# Altium PCB Z80PC.PcbDoc
Units mm, origin at the board's own origin, x right, y up, seen from the top; angles counter-clockwise.
Board outline 90 x 65 mm, 2 copper layers (Top Layer, Bottom Layer); 16 components, 45 nets, 184 pads, 66 vias.
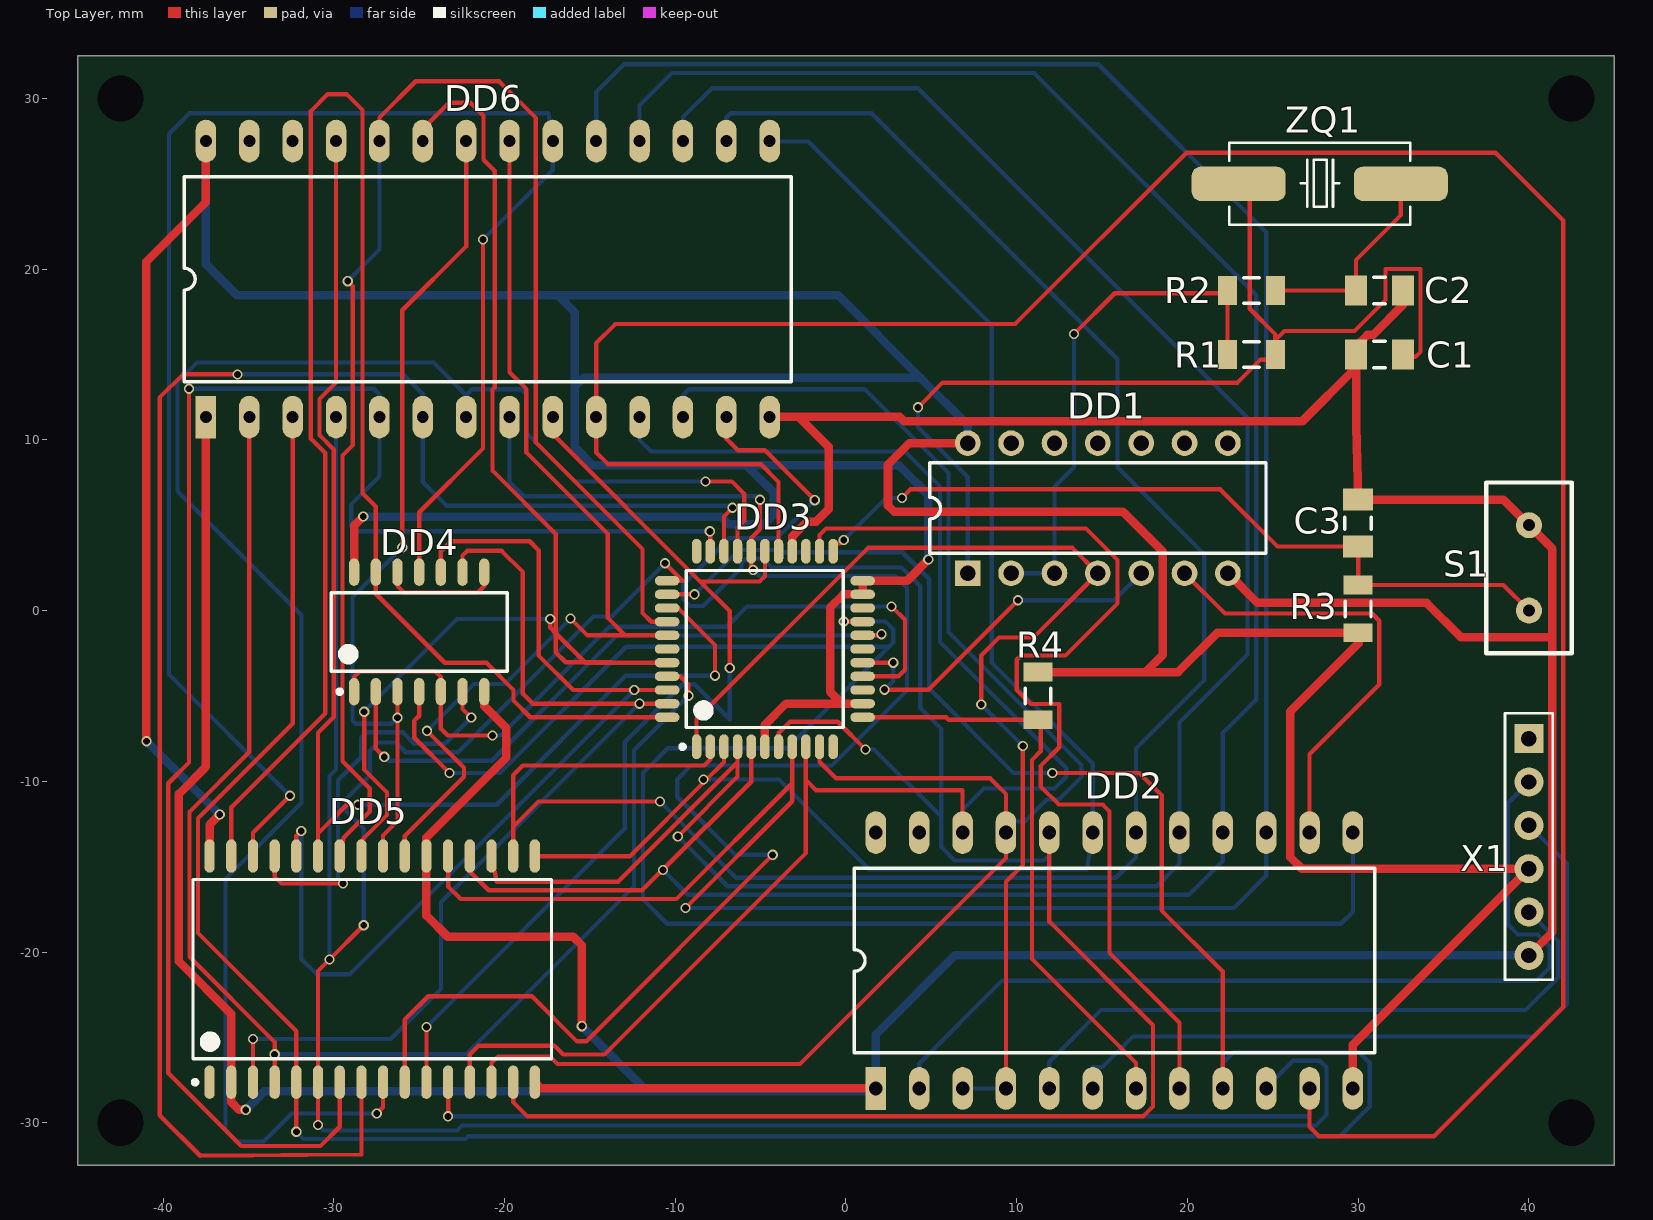
[diagram p0: Top Layer view]
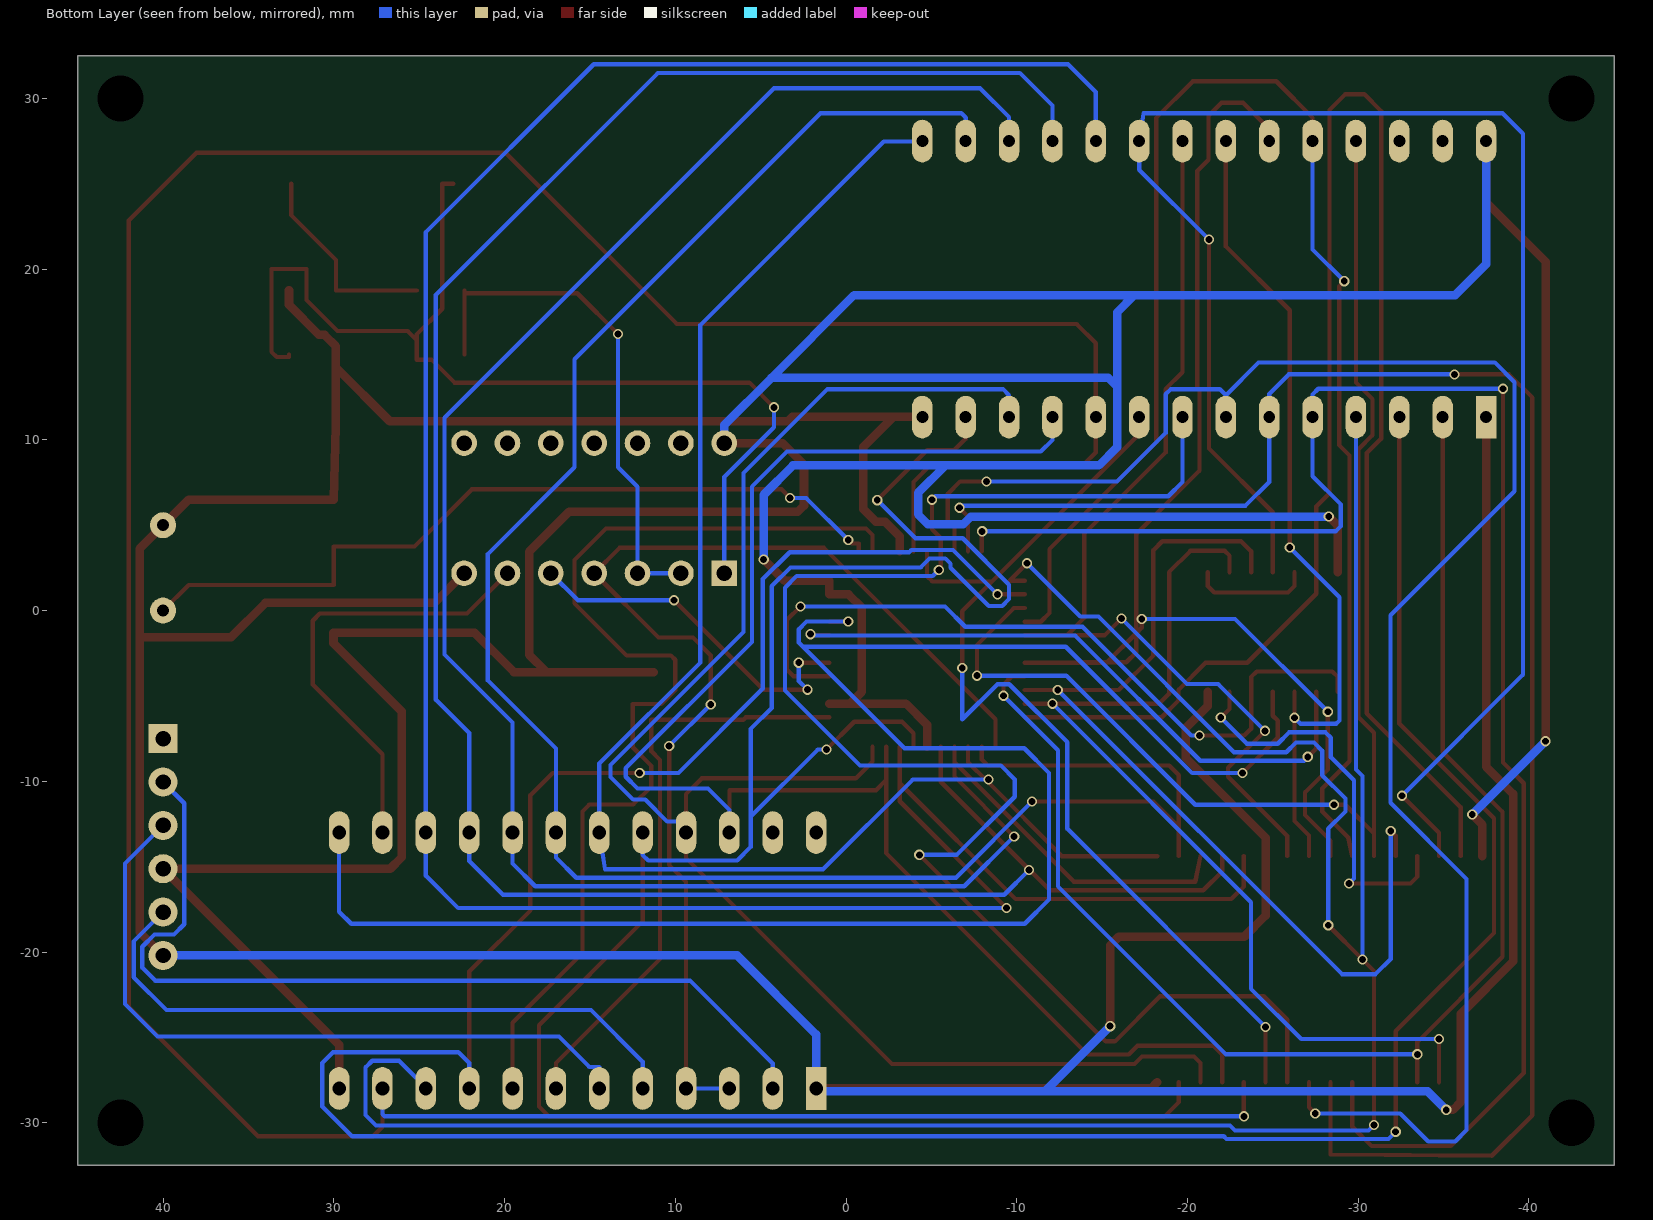
[diagram p1: Bottom Layer view, seen from below]
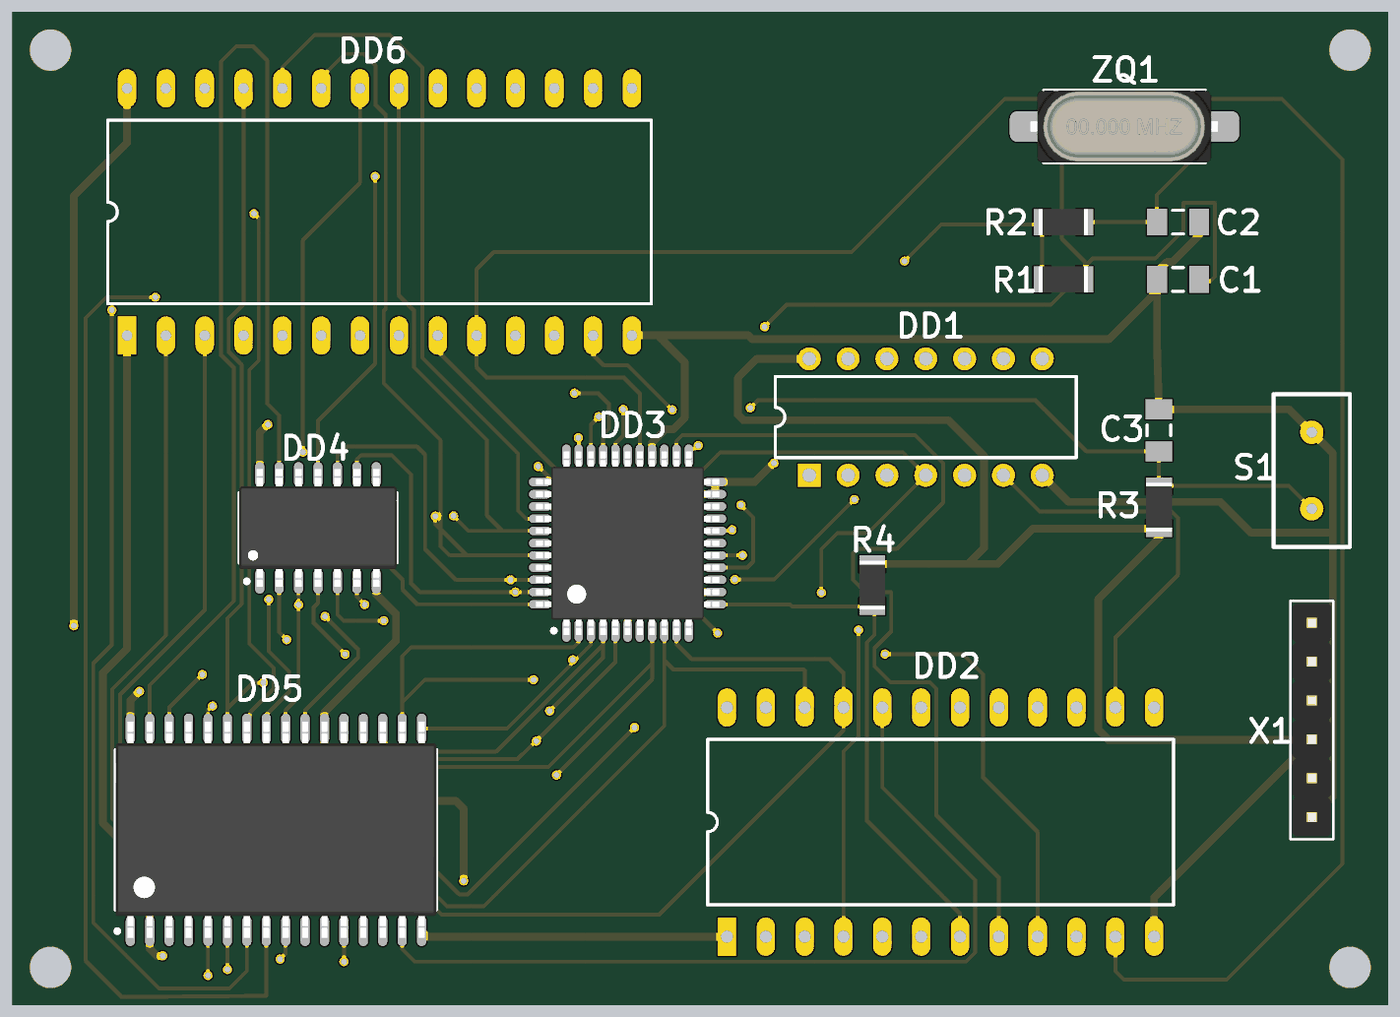
[diagram p2: 3D render of the assembled board from above, using the file's embedded part models]

## Layer stack, top to bottom
Top Solder: solder mask 0.0102, Solder Resist, Dk 3.5
Top Layer: signal copper 0.0356
Dielectric 1: dielectric 0.32, FR-4, Dk 4.8
Bottom Layer: signal copper 0.0356
Bottom Solder: solder mask 0.0102, Solder Resist, Dk 3.5

## Board outline
-45,-32.5 -45,32.5 45,32.5 45,-32.5

## Design rules (kind name [scope] priority, off if disabled: settings)
Clearance [All] p1: gap=0.25 ignorepadtopadclearanceinfootprint=TRUE
ComponentClearance [All] p1: gap=1 collisioncheckmode=3 verticalgap=1 showdistances=FALSE
DiffPairsRouting [InDifferentialPair('No Differential Pair')] p1: maxlimit=0.254 minlimit=0.254 mostfreqgap=0.254 toplayer_minwidth=0.381 toplayer_maxwidth=0.381 toplayer_prefwidth=0.381 bottomlayer_minwidth=0.381 bottomlayer_maxwidth=0.381 bottomlayer_prefwidth=0.381 maxuncoupledlength=12.7
HoleSize [All] p1: absolutevalues=TRUE maxlimit=2.5 minlimit=0.4 maxpercent=80.000 minpercent=20.000
PolygonConnect [All] p1: connectstyle=Relief reliefconductorwidth=0.254 reliefentries=4 polygonreliefangle="90 Angle" airgapwidth=0.254
RoutingVias [All] p1: holewidth=0.4 width=0.6 viastyle="Through Hole" minholewidth=0.4 minwidth=0.6 maxholewidth=0.4 maxwidth=0.6
SolderMaskExpansion [All] p1: expansion=0.1 istentingtop=FALSE
UnRoutedNet [All] p1: checkbadconnections=TRUE
Width GND [InNet('GND')] p1: maxlimit=0.5 minlimit=0.25 preferedwidth=0.5
Width +5 [InNet('+5')] p2: maxlimit=0.5 minlimit=0.25 preferedwidth=0.5
Width [All] p3: maxlimit=0.25 minlimit=0.25 preferedwidth=0.25
26 further rules are at their usual default settings.

## Classes and differential pairs
net class D[0..7]: D0 D1 D2 D3 D4 D5 D6 D7
net class A[0..15]: A0 A1 A2 A3 A4 A5 A6 A7 A8 A9 A10 A11 A12 A13 A14 A15

## Components (designator, comment, footprint, x,y, rotation, side; value= is the part's Value field where it differs from the comment)
C1 "22p" "1206 Capacitor" 31.25,15 r0 top
C2 "22p" "1206 Capacitor" 31.25,18.75 r180 top
C3 "22p" "1206 Capacitor" 30,5.125 r270 top
DD1 "74HCT04" N014 14.75,6 r0 top
DD2 "MC6850S" DIP24 1.75,-27.99 r90 top
DD3 "Z84C0008AEG" LQFP44 -4.75,-2.25 r90 top (schematic designator DD5)
DD4 "74LCX32" SOP14 -25,-1.25 r90 top (schematic designator DD3)
DD5 "HM628128D" SOP32 -27.75,-21 r90 top (schematic designator DD6)
DD6 "M2764A" DIP28 -37.49,11.33 r90 top (schematic designator DD7)
R1 "1M" "1206 Resistor" 23.75,15 r0 top
R2 "1K" "1206 Resistor" 23.75,18.75 r180 top
R3 "2.2K" "1206 Resistor" 30,0.1 r270 top
R4 "3.3K" "1206 Resistor" 11.25,-5 r90 top
S1 "Reset" btn 40,5 r0 top
X1 "USB" PLS-6 40,-13.845 r0 top
ZQ1 "7,3728-HC49SM" HC-49S 27.75,25 r0 top

## Footprints (in the part's own frame and the unit in brackets; to place one, negate y for a bottom-side part, rotate by r counter-clockwise, add the part's x,y. Pads: shape width x height; smd on the part's side, far side on the other; paste and mask are expansions set on the pad)
"1206 Capacitor" [mm] "Chip Capacitor, 2-Leads, Body 3,20x1,60mm, IPC Medium Density"
  rect 1.3x1.75 smd: 1(-1.375,0) 2(1.375,0)
  silkscreen extent -0.35,-0.78 0.35,0.77, body extent -1.6,-0.8 1.6,0.8, height 1.6
"1206 Resistor" [mm] "Chip Resistor, 2-Leads, Body 3,10x1,60mm, IPC Medium Density"
  rect 1.1x1.7 smd: 1(-1.4,0) 2(1.4,0)
  silkscreen extent -0.45,-0.75 0.45,0.75, body extent -1.6,-0.85 1.6,0.85, height 0.65
btn [mil]
  round 60 hole 27.56: 1(0,0) 2(0,-196.85)
  silkscreen extent -98,-295 98,98
DIP24 [mm]
  rect 2.5x1.2 hole 0.8: 1(0,0)
  oval 2.5x1.2 hole 0.8: 2(0,-2.54) 3(0,-5.08) 4(0,-7.62) 5(0,-10.16) 6(0,-12.7) 7(0,-15.24) 8(0,-17.78) 9(0,-20.32) 10(0,-22.86) 11(0,-25.4) 12(0,-27.94) 13(14.99,-27.94) 14(14.99,-25.4) 15(14.99,-22.86) 16(14.99,-20.32) 17(14.99,-17.78) 18(14.99,-15.24) 19(14.99,-12.7) 20(14.99,-10.16) 21(14.99,-7.62) 22(14.99,-5.08) 23(14.99,-2.54) 24(14.99,0)
  silkscreen extent 2.08,-29.21 12.9,1.27, body extent 1,-30 14,2, height 1.55
DIP28 [mm]
  rect 2.5x1.2 hole 0.7: 1(0,0)
  oval 2.5x1.2 hole 0.7: 2(0,-2.54) 3(0,-5.08) 4(0,-7.62) 5(0,-10.16) 6(0,-12.7) 7(0,-15.24) 8(0,-17.78) 9(0,-20.32) 10(0,-22.86) 11(0,-25.4) 12(0,-27.94) 13(0,-30.48) 14(0,-33.02) 15(16.17,-33.02) 16(16.17,-30.48) 17(16.17,-27.94) 18(16.17,-25.4) 19(16.17,-22.86) 20(16.17,-20.32) 21(16.17,-17.78) 22(16.17,-15.24) 23(16.17,-12.7) 24(16.17,-10.16) 25(16.17,-7.62) 26(16.17,-5.08) 27(16.17,-2.54) 28(16.17,0)
  silkscreen extent 2.09,-34.29 14.08,1.27, body extent 1,-35 15,2, height 5.8
HC-49S [mm]
  rrect50% 5.5x2 smd: 1(-4.75,0) 2(4.75,0)
  silkscreen extent -5.3,-2.4 5.3,2.4, body extent -6.17,-2.35 6.13,2.35, height 4.35
LQFP44 [mm] "LQFP, 44-Leads, Body 10,00x10,00mm, Pitch 0,80mm, IPC Medium Densit"
  oval 1.45x0.55 smd: 1(-5.725,4) 2(-5.725,3.2) 3(-5.725,2.4) 4(-5.725,1.6) 5(-5.725,0.8) 6(-5.725,0) 7(-5.725,-0.8) 8(-5.725,-1.6) 9(-5.725,-2.4) 10(-5.725,-3.2) 11(-5.725,-4) 23(5.725,-4) 24(5.725,-3.2) 25(5.725,-2.4) 26(5.725,-1.6) 27(5.725,-0.8) 28(5.725,0) 29(5.725,0.8) 30(5.725,1.6) 31(5.725,2.4) 32(5.725,3.2) 33(5.725,4)
  oval 0.55x1.45 smd: 12(-4,-5.725) 13(-3.2,-5.725) 14(-2.4,-5.725) 15(-1.6,-5.725) 16(-0.8,-5.725) 17(0,-5.725) 18(0.8,-5.725) 19(1.6,-5.725) 20(2.4,-5.725) 21(3.2,-5.725) 22(4,-5.725) 34(4,5.725) 35(3.2,5.725) 36(2.4,5.725) 37(1.6,5.725) 38(0.8,5.725) 39(0,5.725) 40(-0.8,5.725) 41(-1.6,5.725) 42(-2.4,5.725) 43(-3.2,5.725) 44(-4,5.725)
  silkscreen extent -5.85,-4.6 4.6,4.95, body extent -6,-6 6,6, height 1.6
N014 [mm] "DIP; 14 Leads; Row Spacing 7.62 mm; Pitch 2.54 mm"
  rect 1.5x1.5 hole 0.9: 1(-7.62,-3.81)
  round 1.5 hole 0.9: 2(-5.08,-3.81) 3(-2.54,-3.81) 4(0,-3.81) 5(2.54,-3.81) 6(5.08,-3.81) 7(7.62,-3.81) 8(7.62,3.81) 9(5.08,3.81) 10(2.54,3.81) 11(0,3.81) 12(-2.54,3.81) 13(-5.08,3.81) 14(-7.62,3.81)
  silkscreen extent -9.85,-2.65 9.85,2.65
PLS-6 [mm]
  rect 1.7x1.7 hole 0.9: 1(0,6.345)
  round 1.7 hole 0.9: 2(0,3.805) 3(0,1.265) 5(0,-3.815) 6(0,-6.355)
  round 1.7 hole 0.9 mask+0.102: 4(0,-1.275)
  silkscreen extent -1.4,-7.77 1.4,7.83, body extent -1.27,-7.58 1.27,7.66, height 8.54
SOP14 [mm] "SOP, 14-Leads, Body 10,20x5,30mm, Pitch 1,27mm, IPC Medium Density"
  oval 1.6x0.6 smd: 1(-3.5,3.81) 2(-3.5,2.54) 3(-3.5,1.27) 4(-3.5,0) 5(-3.5,-1.27) 6(-3.5,-2.54) 7(-3.5,-3.81) 8(3.5,-3.81) 9(3.5,-2.54) 10(3.5,-1.27) 11(3.5,0) 12(3.5,1.27) 13(3.5,2.54) 14(3.5,3.81)
  silkscreen extent -3.62,-5.15 2.3,5.15, body extent -3.85,-5.15 3.85,5.15, height 2.1
SOP32 [mm] "SOP, 32-Leads, Body 20,70x11,30mm, Pitch 1,27mm, IPC Medium Density"
  oval 1.95x0.6 smd: 1(-6.625,9.525) 2(-6.625,8.255) 3(-6.625,6.985) 4(-6.625,5.715) 5(-6.625,4.445) 6(-6.625,3.175) 7(-6.625,1.905) 8(-6.625,0.635) 9(-6.625,-0.635) 10(-6.625,-1.905) 11(-6.625,-3.175) 12(-6.625,-4.445) 13(-6.625,-5.715) 14(-6.625,-6.985) 15(-6.625,-8.255) 16(-6.625,-9.525) 17(6.625,-9.525) 18(6.625,-8.255) 19(6.625,-6.985) 20(6.625,-5.715) 21(6.625,-4.445) 22(6.625,-3.175) 23(6.625,-1.905) 24(6.625,-0.635) 25(6.625,0.635) 26(6.625,1.905) 27(6.625,3.175) 28(6.625,4.445) 29(6.625,5.715) 30(6.625,6.985) 31(6.625,8.255) 32(6.625,9.525)
  silkscreen extent -6.75,-10.5 5.25,10.5, body extent -7.07,-10.5 7.07,10.5, height 3

## Part data
C1 C2 C3: library part Capacitor
DD1: "6x not gate"
DD2: "ACIA"
DD3: "Z80 CPU, 8Mhz"
DD4: "4x 2-or gates"
DD5: "RAM"
DD6: "eprom"
R1 R2 R3 R4: library part Resistor, "5%, 0.5W"
S1: library part btn
ZQ1: "Резонатор"

## Free pads (board coordinates)
  round 1.524 hole 2.7: 17(-42.5,30) 18(-42.5,-30) 19(42.5,-30) 20(42.5,30)

## Via types
v1: diameter 0.6, hole 0.4, Top Layer to Bottom Layer, 66 vias

## Nets (pads, with @x,y where several pads share a name; then routed paths per layer and width w, separated by ;. In a path a pad name is that pad's centre, name@x,y a point inside that pad or via, vN(x,y) a via of type N, cw(c..) or ccw(c..) an arc to the next point about the centre after c; other vN are vias at no path point)
+5: DD1.14 DD2.12 DD3.6 DD3.13 DD3.21 DD3.22 DD4.14 DD5.32 DD6.28 R3.2 R4.2 X1.4 | length 308.1
  Top Layer w0.5: v1(-40.974,-7.653) -40.974,20.439 -37.49,23.923 DD6.28 ; DD5.32 -37.275,-12.54 v1(-36.681,-11.946) ; DD4.14 -28.81,4.972 v1(-28.274,5.509) ; DD3.6 -4.75,-6.688 -3.512,-5.45 -0.232,-5.45 ; DD3.13 -0.232,-5.45 ; v1(4.823,2.989) 3.583,1.75 DD3.22 DD3.21 -0.155,0.95 -0.93,0.175 -0.93,-4.752 -0.232,-5.45 ; DD1.14 3.718,9.81 2.46,8.552 2.46,6.152 2.816,5.796 16.214,5.796 18.564,3.447 18.564,-2.584 17.548,-3.6 ; R4.2 17.548,-3.6 ; DD2.12 29.69,-25.43 X1.4 26.692,-15.12 26.032,-14.46 26.032,-5.901 30.019,-1.913 30.019,-1.3 R3.2 21.753,-1.3 19.453,-3.6 17.548,-3.6
  Bottom Layer w0.5: v1(-40.974,-7.653) v1(-36.681,-11.946) ; DD6.28 -37.49,20.283 -35.684,18.477 -16.888,18.477 ; v1(-28.274,5.509) -7.319,5.509 -6.857,5.047 -4.804,5.047 -4.22,5.631 -4.22,6.901 -5.82,8.501 ; v1(4.823,2.989) 4.823,6.787 3.108,8.501 -5.82,8.501 ; DD1.14 7.13,10.874 4.372,13.632 ; -16.888,18.477 -0.473,18.477 4.372,13.632 ; -16.888,18.477 -15.878,17.467 -15.878,13.124 ; -15.878,13.124 -15.878,9.568 -14.812,8.501 -5.82,8.501 ; -15.878,13.124 -15.37,13.632 4.372,13.632
A0: DD2.11 DD3.27 DD5.12 DD6.10 | length 205.3
  Top Layer w0.25: v1(-23.305,-29.624) DD5.12 ; DD3.27 -3.95,7.536 -4.991,8.577 -13.948,8.577 -14.63,9.259 DD6.10 -14.63,15.664 -13.509,16.785 9.906,16.785 19.936,26.815 38.046,26.815 42.008,22.852 42.008,-23.223 34.439,-30.793 27.708,-30.793 27.15,-30.235 DD2.11
  Bottom Layer w0.25: v1(-23.305,-29.624) 27.023,-29.624 27.15,-29.497 DD2.11
A1: DD3.28 DD5.11 DD6.9 | length 60.5
  Top Layer w0.25: DD5.11 v1(-24.575,-24.392) ; DD6.9 -17.17,10.326 -8.543,1.699 ; v1(-6.811,-3.361) -6.811,-0.033 -8.543,1.699 ; DD3.28 -4.75,2.007 -5.058,1.699 -8.543,1.699
  Bottom Layer w0.25: v1(-24.575,-24.392) -12.965,-12.782 -12.965,-7.711 -9.565,-4.311 -8.868,-4.311 -6.811,-6.369 v1(-6.811,-3.361)
A2: DD3.29 DD5.10 DD6.8 | length 93.8
  Top Layer w0.25: DD5.10 -25.845,-23.96 -24.473,-22.588 -18.388,-22.588 -15.747,-25.23 -15.218,-25.23 v1(-4.296,-14.308) ; v1(-5.439,2.38) -5.55,2.491 DD3.29 -5.55,4.255 -5.042,4.763 v1(-5.042,6.495)
  Bottom Layer w0.25: DD6.8 -19.71,7.536 -18.87,6.696 -5.244,6.696 v1(-5.042,6.495) ; v1(-5.439,2.38) -5.083,2.024 2.892,2.024 3.578,1.338 3.578,-4.681 -0.816,-9.076 -9.071,-9.076 -9.884,-9.888 -9.884,-10.904 -6.48,-14.308 v1(-4.296,-14.308)
A3: DD3.30 DD5.9 DD6.7 | length 103.8
  Top Layer w0.25: v1(-27.481,-29.457) -27.115,-29.091 DD5.9 ; v1(-8.233,7.561) -6.685,7.561 -5.967,6.843 -5.967,5.246 -6.35,4.864 DD3.30
  Bottom Layer w0.25: v1(-27.481,-29.457) -32.467,-29.457 -34.108,-31.097 -35.681,-31.097 -36.351,-30.427 -36.351,-15.72 -31.891,-11.26 -31.891,-0.276 -39.159,6.992 -39.159,13.378 -38.004,14.533 -24.167,14.533 -22.25,12.616 ; DD6.7 -22.25,12.616 ; v1(-8.233,7.561) -15.878,7.561 -18.723,10.406 -18.723,12.667 -19.028,12.972 -21.894,12.972 -22.25,12.616
A4: DD3.31 DD5.8 DD6.6 | length 102.2
  Top Layer w0.25: v1(-35.64,13.835) -38.84,13.835 -40.201,12.474 -40.201,-29.558 -37.824,-31.936 -28.385,-31.859 DD5.8 ; DD3.31 -7.15,5.513 v1(-6.642,6.021)
  Bottom Layer w0.25: v1(-35.64,13.835) -25.937,13.835 -24.79,12.688 DD6.6 -24.79,7.536 -23.401,6.147 -6.768,6.147 v1(-6.642,6.021)
A5: DD3.32 DD5.7 DD6.5 | length 97.5
  Top Layer w0.25: v1(-38.484,12.997) -38.484,-8.893 -39.701,-10.11 -39.701,-27.087 -35.422,-31.366 -30.787,-31.366 -29.655,-30.234 DD5.7 ; v1(-7.975,4.64) -7.95,4.615 DD3.32
  Bottom Layer w0.25: v1(-38.484,12.997) -27.664,12.997 -27.33,12.663 DD6.5 -27.33,7.87 -28.985,6.215 -28.985,4.945 -28.68,4.64 v1(-7.975,4.64)
A6: DD2.10 DD3.34 DD5.6 DD6.4 | length 147.7
  Top Layer w0.25: v1(-30.925,-30.132) DD5.6 -30.925,-21.105 v1(-30.253,-20.434) v1(-28.248,-18.429) ; v1(-10.598,2.769) -9.579,1.75 DD3.34
  Bottom Layer w0.25: v1(-30.925,-30.132) -30.608,-30.45 -22.785,-30.45 -22.493,-30.158 27.53,-30.158 28.14,-29.548 28.14,-26.754 27.751,-26.365 26.184,-26.365 25.211,-27.338 24.61,-27.338 DD2.10 ; v1(-30.253,-20.434) -30.253,-9.694 -29.87,-9.311 DD6.4 ; v1(-28.248,-18.429) -28.248,-12.773 -29.253,-11.768 -29.253,-11.006 -27.888,-9.64 -27.888,-8.206 -27.41,-7.728 -26.359,-7.728 -25.791,-8.296 -22.731,-8.296 -14.785,-0.351 -13.718,-0.351 v1(-10.598,2.769)
A7: DD2.9 DD3.35 DD5.5 DD6.3 | length 182
  Top Layer w0.25: DD6.3 -32.41,-6.619 -37.951,-12.16 -37.951,-18.884 -32.195,-24.64 DD5.5 v1(-32.195,-30.526) ; DD3.35 v1(-8.868,0.95) ; v1(12.087,-9.507) 17.177,-9.507 18.488,-10.819 18.488,-17.559 22.07,-21.141 DD2.9
  Bottom Layer w0.25: v1(-32.195,-30.526) -31.771,-30.95 -22.287,-30.95 -22.13,-30.793 28.927,-30.793 30.68,-29.04 30.68,-26.5 30.045,-25.865 22.705,-25.865 22.07,-26.5 DD2.9 ; v1(-8.868,0.95) -6.263,3.555 -3.828,3.555 -3.694,3.421 3.299,3.421 4.873,1.846 4.873,-4.572 9.809,-9.507 v1(12.087,-9.507)
A8: DD3.36 DD5.27 DD6.25 | length 75.6
  Top Layer w0.25: DD5.27 -30.925,-13.048 ; DD6.25 -29.87,13.359 -30.845,12.384 -30.845,10.276 -30,9.431 -30,-6.226 -30.925,-7.151 -30.925,-13.048 ; v1(-28.578,-11.37) -29.247,-11.37 -30.925,-13.048 ; DD3.36 -9.833,0.15 -7.674,-2.009 v1(-7.674,-3.811)
  Bottom Layer w0.25: v1(-28.578,-11.37) -20.454,-11.37 -12.896,-3.811 v1(-7.674,-3.811)
A9: DD3.37 DD5.26 DD6.24 | length 89.9
  Top Layer w0.25: DD5.26 -29.417,-13.292 -27.893,-11.768 -27.893,-10.422 -29.493,-8.822 -29.493,9.085 -28.883,9.695 -28.883,18.991 v1(-29.188,19.296) ; DD6.24 -27.33,28.872 -25.202,31 -20.318,31 -18.164,28.847 -18.164,9.847 -11.916,3.599 -11.916,-0.142 -11.408,-0.65 DD3.37
  Bottom Layer w0.25: v1(-29.188,19.296) -27.33,21.154 DD6.24
A10: DD3.38 DD5.23 DD6.21 | length 58.6
  Top Layer w0.25: DD5.23 -25.845,-13.2 -22.381,-9.736 -22.381,-9.203 v1(-24.54,-7.044) ; DD6.21 -19.71,13.958 -18.723,12.972 -18.723,9.263 -13.948,4.488 -13.948,-0.434 -12.932,-1.45 ; v1(-16.132,-0.465) -15.147,-1.45 -12.932,-1.45 ; DD3.38 -12.932,-1.45
  Bottom Layer w0.25: v1(-24.54,-7.044) -21.797,-4.3 -19.968,-4.3 v1(-16.132,-0.465)
A11: DD3.40 DD5.25 DD6.23 | length 73
  Top Layer w0.25: DD5.25 -28.385,-13.476 -26.885,-11.975 -26.885,-10.646 -28.223,-9.308 v1(-28.223,-5.926) ; DD6.23 -24.79,28.21 -23.25,29.75 -22,29.75 -21.238,28.988 -21.238,26.408 -20.577,25.748 -20.577,13.073 -20.704,12.946 -20.704,8.196 -16.996,4.488 -16.996,-1.329 ; v1(-17.326,-0.49) -17.326,-0.998 -16.996,-1.329 ; DD3.40 -13.745,-3.05 ; -16.996,-1.329 -16.996,-2.446 -16.412,-3.03 -15.294,-3.03 ; -16.996,-1.329 -15.294,-3.03 ; -15.294,-3.03 -15.275,-3.05 -13.745,-3.05 ; -15.294,-3.03 -13.764,-3.03 -13.745,-3.05
  Bottom Layer w0.25: v1(-28.223,-5.926) -22.787,-0.49 v1(-17.326,-0.49)
A12: DD3.41 DD5.4 DD6.2 | length 82.2
  Top Layer w0.25: DD6.2 -34.95,-8.286 -38.451,-11.787 -38.451,-20.279 -33.465,-25.265 v1(-33.465,-25.992) DD5.4 ; DD3.41 -9.706,-3.85 -9.224,-4.333 v1(-9.224,-4.986)
  Bottom Layer w0.25: v1(-33.465,-25.992) -22.254,-25.992 -12.414,-16.152 -12.414,-8.177 v1(-9.224,-4.986)
A13: DD3.42 DD4.10 DD5.28 | length 57.8
  Top Layer w0.25: DD5.28 -32.195,-13.194 v1(-31.906,-12.905) ; DD4.10 -23.73,3.472 -23.138,4.064 -18.528,4.064 -18.001,3.537 -18.001,-2.629 -15.98,-4.65 v1(-12.406,-4.65) DD3.42
  Bottom Layer w0.25: v1(-31.906,-12.905) -31.906,-20.404 -31.017,-21.293 -29.049,-21.293 v1(-12.406,-4.65)
A14: DD3.43 DD4.9 DD5.3 | length 57.2
  Top Layer w0.25: DD5.3 v1(-34.735,-25.095) ; DD4.9 -22.46,3.218 -22.181,3.497 -20.171,3.497 -18.926,2.253 -18.926,-4.871 -18.347,-5.45 v1(-12.094,-5.45) DD3.43
  Bottom Layer w0.25: v1(-34.735,-25.095) -26.666,-25.095 -23.727,-22.157 -23.727,-17.083 v1(-12.094,-5.45)
A15: DD3.44 DD4.13 DD5.31 | length 99.2
  Top Layer w0.25: DD5.31 -36.005,-11.524 -30.5,-6.019 -30.5,9.224 -31.345,10.069 -31.345,29.259 -30.354,30.25 -29.25,30.25 -28.324,29.324 -28.324,6.876 -27.54,6.091 DD4.13 -27.54,0.983 -23.501,-3.056 -21.06,-3.056 -19.472,-4.644 -19.472,-5.273 -18.495,-6.25 DD3.44
D0: DD2.22 DD3.9 DD5.13 DD6.11 | length 93
  Top Layer w0.25: DD5.13 -22.035,-25.992 -21.527,-25.484 -17.074,-25.484 -16.563,-25.994 -14.152,-25.994 -2.35,-14.192 -2.35,-9.929 ; DD3.9 -2.35,-9.929 ; DD2.22 6.83,-10.549 6.805,-10.523 -1.756,-10.523 -2.35,-9.929
  Bottom Layer w0.25: DD6.11 -12.09,9.996 -11.408,9.314 3.451,9.314 5.505,7.261 5.505,-1.834 12.898,-9.228 12.898,-9.736 12.208,-10.427 8.082,-10.427 6.83,-11.679 DD2.22
D1: DD2.21 DD3.10 DD5.14 DD6.12 | length 99.1
  Top Layer w0.25: DD5.14 -20.765,-26.5 -20.384,-26.119 -17.333,-26.119 -16.899,-26.552 -2.697,-26.552 9.37,-14.486 DD2.21 9.37,-10.752 8.445,-9.827 -0.573,-9.827 -1.55,-8.85 DD3.10
  Bottom Layer w0.25: DD6.12 -9.55,12.616 -9.194,12.972 1.089,12.972 6.005,8.056 6.005,-1.254 13.789,-9.038 13.789,-9.749 12.468,-11.07 11.757,-11.07 10.475,-12.352 9.37,-12.352 DD2.21
D2: DD2.20 DD3.7 DD5.15 DD6.13 | length 129.2
  Top Layer w0.25: DD5.15 -19.495,-28.786 -18.657,-29.624 17.396,-29.624 17.98,-29.04 17.98,-24.289 11.91,-18.22 DD2.20 ; DD6.13 -7.01,10.072 -6.328,9.39 -4.753,9.39 v1(-1.832,6.469) ; DD3.7 -3.95,-7.18 -3.28,-6.51 -0.486,-6.51 v1(1.14,-8.136)
  Bottom Layer w0.25: v1(-1.832,6.469) -4.067,4.234 -6.836,4.234 -9.554,1.516 -9.554,0.678 -9.151,0.275 -8.357,0.275 -6.125,2.507 -6.125,2.75 -5.82,3.055 -4.895,3.055 -4.371,2.531 3.249,2.531 4.347,1.433 4.347,-5.704 5.585,-6.942 5.585,-12.073 ; v1(1.14,-8.136) 1.648,-8.136 5.585,-12.073 ; DD2.20 11.91,-14.308 11.58,-14.638 6.372,-14.638 5.585,-13.851 5.585,-12.073
D3: DD2.19 DD3.3 DD5.17 DD6.15 | length 90.9
  Top Layer w0.25: DD5.17 -18.225,-14.384 -12.653,-14.384 v1@-8.251,-9.983 ; v1(-8.345,-9.888) v1@-8.251,-9.983 ; DD3.3 -7.15,-8.882 v1@-8.251,-9.983
  Bottom Layer w0.25: v1(-8.345,-9.888) -3.915,-9.888 1.343,-15.146 14.12,-15.146 DD2.19 14.45,-8.955 8.531,-3.036 8.531,16.731 -2.213,27.475 -4.47,27.475 DD6.15
D4: DD2.18 DD3.2 DD5.18 DD6.16 | length 120.1
  Top Layer w0.25: DD5.18 -19.495,-12.667 ; v1(-10.9,-11.184) -18.012,-11.184 -19.495,-12.667 ; DD3.2 -7.95,-8.72 -8.306,-9.076 -18.931,-9.076 -19.495,-9.64 -19.495,-12.667
  Bottom Layer w0.25: v1(-10.9,-11.184) -6.438,-15.646 15.804,-15.646 16.99,-14.46 DD2.18 16.99,-8.084 20.977,-4.097 20.977,3.32 15.897,8.4 15.897,14.724 1.495,29.126 -6.756,29.126 -7.01,28.872 DD6.16
D5: DD2.17 DD3.4 DD5.19 DD6.17 | length 127.3
  Top Layer w0.25: DD5.19 -20.46,-15.883 -13.347,-15.883 -6.35,-8.886 ; v1(-9.849,-13.225) -6.35,-9.726 -6.35,-8.886 ; DD3.4 -6.35,-8.886
  Bottom Layer w0.25: v1(-9.849,-13.225) -6.928,-16.146 18.2,-16.146 19.53,-14.816 DD2.17 19.53,-6.561 23.517,-2.574 23.517,11.295 4.213,30.599 -7.852,30.599 -9.55,28.901 DD6.17
D6: DD2.16 DD3.5 DD5.20 DD6.18 | length 142.4
  Top Layer w0.25: DD5.20 -22.035,-15.273 -20.925,-16.383 -11.959,-16.383 -10.743,-15.176 -5.55,-10.025 ; v1(-10.722,-15.197) -5.55,-10.025 ; DD3.5 -5.55,-10.025
  Bottom Layer w0.25: DD6.18 -12.09,29.583 -10.185,31.488 11.02,31.488 24.025,18.483 24.025,-5.215 22.07,-7.17 DD2.16 22.07,-14.664 20.087,-16.646 -9.273,-16.646 v1(-10.722,-15.197)
D7: DD2.15 DD3.8 DD5.21 DD6.19 | length 156.4
  Top Layer w0.25: DD5.21 -23.305,-16.162 -22.568,-16.899 -9.935,-16.899 -3.15,-10.114 ; v1(-9.401,-17.419) -3.15,-11.168 -3.15,-10.114 ; DD3.8 -3.15,-10.114
  Bottom Layer w0.25: DD6.19 -14.63,30.37 -13,32 14.776,32 24.61,22.166 DD2.15 24.61,-15.527 22.718,-17.419 v1(-9.401,-17.419)
GND: C1.1 C2.1 C3.1 DD1.7 DD2.1 DD3.26 DD4.7 DD5.2 DD5.16 DD5.22 DD6.1 DD6.14 S1.1 X1.6 | length 296.3
  Top Layer w0.5: DD6.1 -37.49,-9.149 -39.076,-10.735 -39.076,-20.549 -36.005,-23.62 DD5.2 -36.005,-28.786 -35.548,-29.243 v1(-35.157,-29.243) ; DD4.7 -21.19,-5.593 -19.892,-6.891 -19.892,-8.609 -24.575,-13.292 DD5.22 -24.575,-17.864 -23.33,-19.109 -15.98,-19.109 -15.472,-19.617 v1(-15.472,-24.341) ; DD5.16 -17.86,-27.99 DD2.1 ; DD6.14 -4.47,11.346 -2.772,11.346 ; DD3.26 -3.15,4.339 -2.288,5.2 -1.756,5.2 -1.019,5.937 -1.019,9.593 -2.772,11.346 ; DD1.7 24.11,0.45 34.007,0.45 36.014,-1.557 41.373,-1.557 ; C2.1 32.625,17.909 30.867,16.151 30.54,16.151 29.875,15.486 C1.1 C1.1@29.875,14.242 ; X1.6 41.373,-18.827 41.373,-1.557 ; -2.772,11.346 3.149,11.346 3.402,11.093 26.727,11.093 C1.1@29.875,14.242 ; C1.1@29.875,14.242 29.875,10.811 C3.1 38.5,6.5 S1.1 41.373,3.627 41.373,-1.557
  Bottom Layer w0.5: v1(-35.157,-29.243) -34.065,-28.151 -11.662,-28.151 ; v1(-15.472,-24.341) -11.662,-28.151 ; X1.6 6.373,-20.2 1.75,-24.823 DD2.1 1.75,-28.151 -11.662,-28.151
NetC1_2: C1.2 DD1.1 R1.2 ZQ1.1 | length 62
  Top Layer w0.25: v1(4.213,11.905) 5.661,13.353 22.933,13.353 24.279,14.699 25.15,14.699 R1.2 25.15,15.857 ; ZQ1.1 23.644,25 23.644,17.678 25.15,16.172 25.15,15.857 ; C1.2 32.625,14.851 33.347,14.851 33.652,15.156 33.652,20.007 31.594,20.007 31.594,18.194 29.783,16.383 25.676,16.383 25.15,15.857
  Bottom Layer w0.25: v1(4.213,11.905) 4.213,10.736 7.13,7.819 DD1.1
NetC2_2: C2.2 R2.1 ZQ1.2 | length 12.1
  Top Layer w0.25: R2.1 27.505,18.75 C2.2 29.875,20.541 32.5,23.166 ZQ1.2
NetC3_2: C3.2 DD3.23 R3.1 S1.2 | length 46.8
  Top Layer w0.25: DD3.23 -0.75,3.929 -0.334,3.929 v1(-0.13,4.132) ; v1(3.273,6.596) 3.781,7.104 21.915,7.104 25.27,3.75 C3.2 R3.1 38.5,1.5 S1.2
  Bottom Layer w0.25: v1(-0.13,4.132) 2.333,6.596 v1(3.273,6.596)
NetDD1_2: DD1.2 DD1.3 R1.1 R2.2 | length 30.8
  Top Layer w0.25: v1(13.357,16.197) 15.745,18.585 R2.2@22.35,18.585 ; R1.1 22.35,16.858 R2.2@22.35,18.585 ; R2.2 R2.2@22.35,18.585
  Bottom Layer w0.25: DD1.2 DD1.3 12.21,7.253 13.357,8.4 v1(13.357,16.197)
NetDD1_4: DD1.4 DD2.3 DD2.4 DD3.1 | length 68
  Top Layer w0.25: DD3.1 -8.75,-6.367 1.292,3.675 13.265,3.675 DD1.4 10.977,-1.583 8.963,-1.583 7.921,-2.624 v1(7.921,-5.494) ; DD2.4 9.37,-15.882 10.36,-14.892 v1(10.36,-7.933)
  Bottom Layer w0.25: DD2.3 DD2.4 ; v1(7.921,-5.494) v1(10.36,-7.933)
NetDD1_5: DD1.5 DD3.16 | length 21.4
  Top Layer w0.25: DD3.16 v1(2.765,-3.05) ; v1(2.257,-4.631) 4.848,-4.631 v1(10.08,0.602)
  Bottom Layer w0.25: v1(2.257,-4.631) 2.765,-4.123 v1(2.765,-3.05) ; v1(10.08,0.602) 15.702,0.602 DD1.5
NetDD1_6: DD1.6 DD2.14 | length 26.7
  Top Layer w0.25: DD1.6 22.195,-0.175 30.822,-0.175 31.239,-0.592 31.239,-4.326 27.15,-8.414 DD2.14
NetDD2_2: DD2.2 X1.2 | length 53.8
  Bottom Layer w0.25: DD2.2 4.29,-26.525 9.141,-21.674 40.463,-21.674 41.225,-20.912 41.225,-19.693 40.507,-18.975 39.36,-18.975 38.757,-18.372 38.757,-11.283 X1.2
NetDD2_5: DD2.5 X1.5 | length 38
  Bottom Layer w0.25: DD2.5 11.91,-26.423 14.932,-23.401 39.798,-23.401 41.725,-21.475 41.725,-19.385 X1.5
NetDD2_6: DD2.6 X1.3 | length 42
  Bottom Layer w0.25: DD2.6 14.45,-26.729 15.033,-26.729 16.811,-24.951 40.332,-24.951 42.237,-23.046 42.237,-14.817 X1.3
NetDD2_7: DD2.7 DD3.12 R4.1 | length 34.8
  Top Layer w0.25: DD3.12 5.866,-6.25 6.016,-6.4 R4.1 11.401,-6.4 11.401,-8.237 10.893,-8.745 10.893,-20.403 16.99,-26.5 DD2.7
NetDD2_8: DD2.8 DD3.24 | length 61.6
  Top Layer w0.25: DD3.24 -1.55,4.425 -1.168,4.807 14.054,4.807 15.897,2.964 15.897,0.424 12.849,-2.624 10.258,-2.624 10.004,-2.878 10.004,-4.656 10.817,-5.469 12.493,-5.469 12.493,-8.009 11.401,-9.101 11.401,-10.295 12.468,-11.362 15.033,-11.362 15.44,-11.768 15.44,-20.048 19.53,-24.139 DD2.8
NetDD2_13: DD2.13 DD3.19 DD4.4 | length 112.2
  Top Layer w0.25: DD4.4 -25,-6.155 -25.291,-6.446 -25.291,-7.45 v1(-23.227,-9.514) ; v1(-0.13,-0.643) -0.123,-0.65 DD3.19
  Bottom Layer w0.25: v1(-23.227,-9.514) -20.273,-9.514 -12.875,-2.116 2.511,-2.116 2.765,-1.862 ; v1(-0.13,-0.643) 2.308,-0.643 2.765,-1.1 2.765,-1.862 ; DD2.13 29.69,-17.635 28.979,-18.347 -10.468,-18.347 -11.891,-16.924 -11.891,-9.507 -10.443,-8.06 -3.422,-8.06 2.765,-1.873 2.765,-1.862
NetDD3_15: DD3.15 DD4.1 DD4.5 | length 45.6
  Top Layer w0.25: DD4.1 -28.81,-3.894 -28.48,-3.564 -24.06,-3.564 -23.73,-3.894 DD4.5 -23.73,-6.917 -23.324,-7.323 v1(-20.704,-7.323) ; DD3.15 3.07,-3.85 3.451,-3.469 3.451,-0.541 v1(2.664,0.246)
  Bottom Layer w0.25: v1(-20.704,-7.323) -20.222,-7.323 -13.846,-0.948 -6.988,-0.948 -5.795,0.246 v1(2.664,0.246)
NetDD3_18: DD3.18 DD4.2 | length 37.4
  Top Layer w0.25: DD4.2 -27.54,-8.076 v1(-27.048,-8.568) ; DD3.18 2.009,-1.45 v1(2.079,-1.379)
  Bottom Layer w0.25: v1(-27.048,-8.568) -26.82,-8.796 -20.754,-8.796 -13.42,-1.462 1.997,-1.462 v1(2.079,-1.379)
NetDD4_3: DD4.3 DD5.24 DD6.22 | length 49.5
  Top Layer w0.25: DD5.24 -27.115,-13.175 -26.27,-12.33 v1(-26.27,-6.282) DD4.3 ; v1(-25.988,3.701) -25.988,17.591 -22.25,21.328 DD6.22
  Bottom Layer w0.25: v1(-26.27,-6.282) -26.621,-6.632 -28.71,-6.632 -28.909,-6.434 -28.909,0.78 v1(-25.988,3.701)
NetDD4_6: DD4.6 DD5.29 | length 23.8
  Top Layer w0.25: DD5.29 -33.465,-15.578 -33.059,-15.984 v1(-29.467,-15.984) ; DD4.6 -22.46,-5.759 v1(-21.952,-6.267)
  Bottom Layer w0.25: v1(-29.467,-15.984) -29.753,-15.698 -29.753,-9.939 -28.401,-8.586 -28.401,-7.45 -28.083,-7.132 -25.954,-7.132 -25.291,-7.796 -23.481,-7.796 v1(-21.952,-6.267)
NetDD4_8: DD4.8 DD4.12 | length 7
  Top Layer w0.25: DD4.12 -26.27,1.44 -25.889,1.059 -21.568,1.059 -21.19,1.437 DD4.8
NetDD4_11: DD4.11 DD5.30 DD6.20 | length 99
  Top Layer w0.25: DD5.30 -34.735,-13.013 v1(-32.566,-10.844) ; DD4.11 -25,5.758 -21.263,9.495 v1(-21.263,21.731)
  Bottom Layer w0.25: v1(-32.566,-10.844) -39.659,-3.751 -39.659,27.926 -38.459,29.126 -17.424,29.126 DD6.20 -17.17,25.824 v1(-21.263,21.731)
pads on no net: DD1.8 DD1.9 DD1.10 DD1.11 DD1.12 DD1.13 DD2.23 DD2.24 DD3.11 DD3.14 DD3.17 DD3.20 DD3.25 DD3.33 DD3.39 DD5.1 DD6.26 DD6.27 X1.1

## Silkscreen, mask and mechanical layers (free items; w line width, h text height)
Mechanical 13:
  the board outline again, w0.254